# Altium PCB PCB1.PcbDoc
Units mm, origin at the board's own origin, x right, y up, seen from the top; angles counter-clockwise.
Board outline 82 x 40 mm, 2 copper layers (Top Layer, Bottom Layer); 10 components, 35 nets, 102 pads, 0 vias.
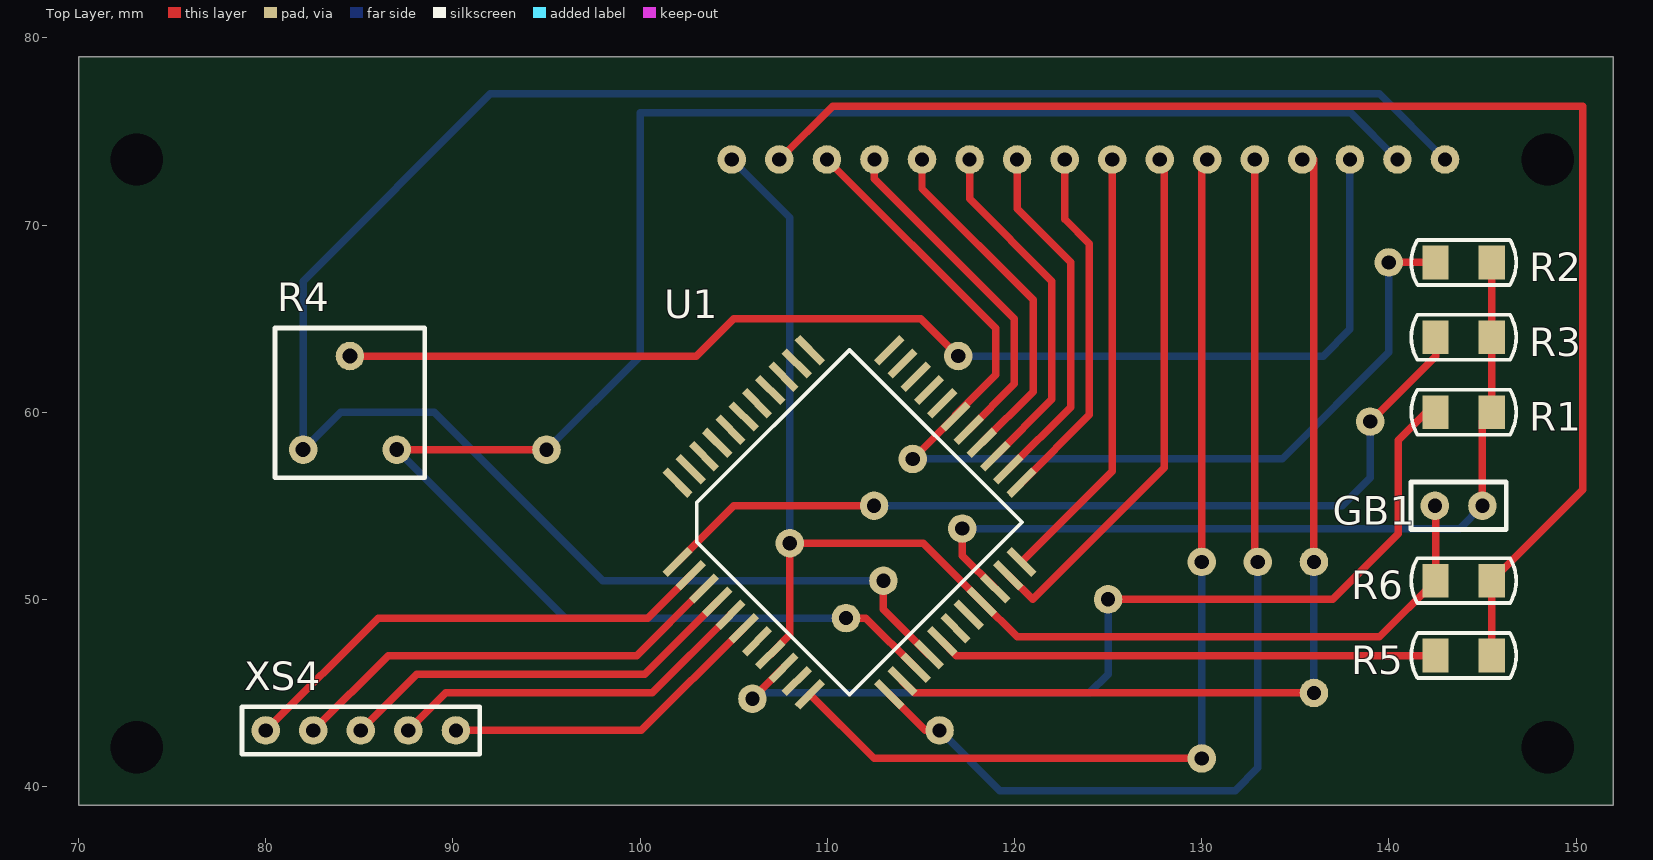
[diagram p0: Top Layer view]
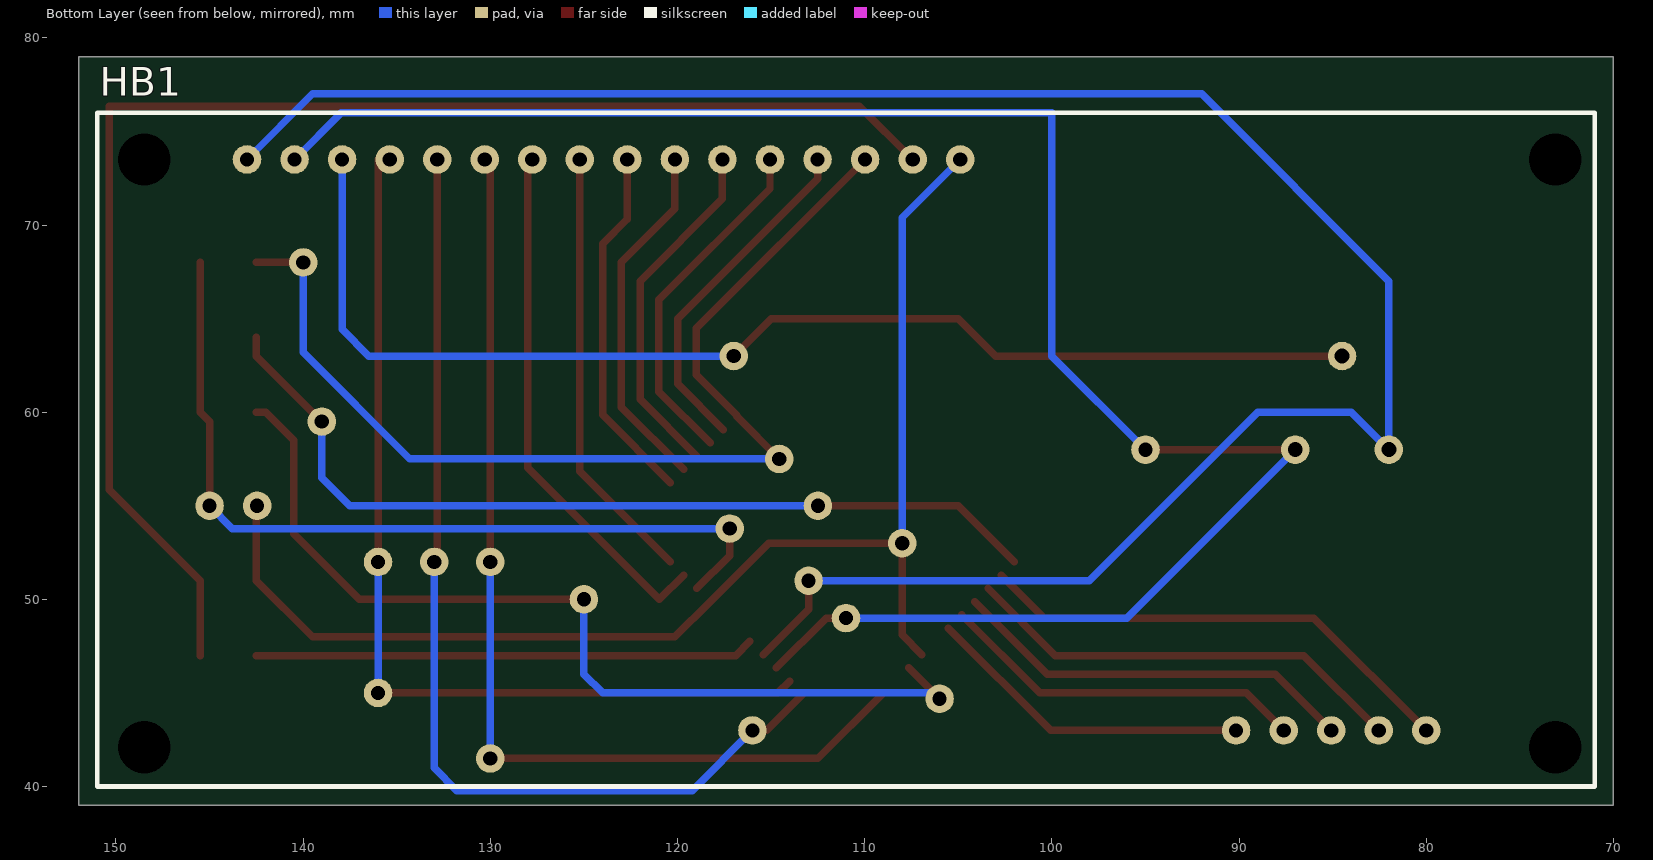
[diagram p1: Bottom Layer view, seen from below]
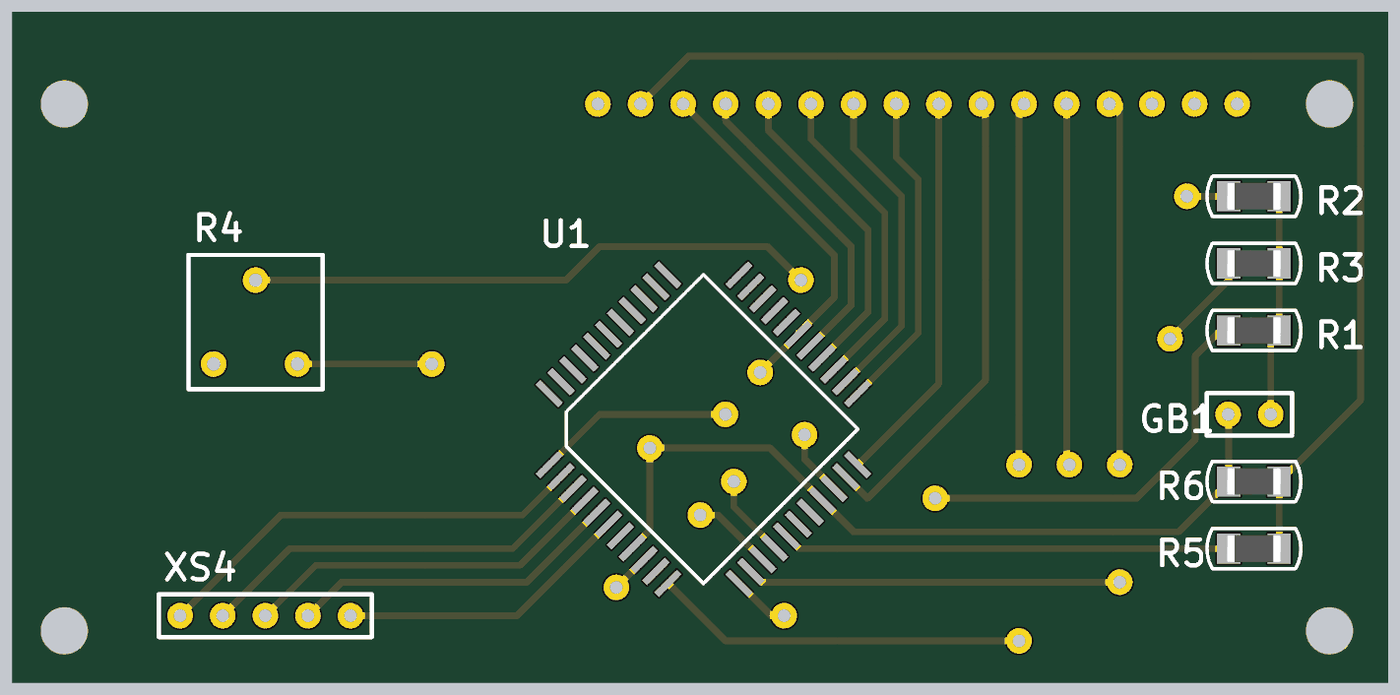
[diagram p2: 3D render of the assembled board from above, using the file's embedded part models]

## Layer stack, top to bottom
Top Solder: solder mask 0.0102, Solder Resist, Dk 3.5
Top Layer: signal copper 0.0356
Dielectric1: dielectric 0.32, FR-4, Dk 4.8
Bottom Layer: signal copper 0.0356
Bottom Solder: solder mask 0.0102, Solder Resist, Dk 3.5

## Board outline
70,39 152,39 152,79 70,79

## Design rules (kind name [scope] priority, off if disabled: settings)
Clearance [All] p1: gap=0.254 ignorepadtopadclearanceinfootprint=FALSE except(0: Arc-Hole Track-Hole SMDPad-Hole THPad-Hole Via-Hole Fill-Hole Poly-Hole Region-Hole Text-Hole)
DiffPairsRouting [All] p1: maxlimit=0.4 minlimit=0.4 mostfreqgap=0.4 toplayer_minwidth=0.381 toplayer_maxwidth=0.381 toplayer_prefwidth=0.381 bottomlayer_minwidth=0.381 bottomlayer_maxwidth=0.381 bottomlayer_prefwidth=0.381 maxuncoupledlength=12.7
PolygonConnect [All] p1: connectstyle=Relief reliefconductorwidth=0.254 reliefentries=4 polygonreliefangle="90 Angle" airgapwidth=0.254
RoutingVias [All] p1: holewidth=0.711 width=1.27 viastyle="Through Hole" minholewidth=0.711 minwidth=1.27 maxholewidth=0.711 maxwidth=1.27
SolderMaskExpansion [All] p1: expansion=0.102
Width [All] p1: maxlimit=0.4 minlimit=0.4 preferedwidth=0.4 minimp=50.000000 maximp=50.000000 favimp=50.000000
29 further rules are at their usual default settings.

## Classes and differential pairs
component class "Keyboard Schematic": VD1 VD2 VD3 VD4 VD5 VD6 XS1 XS2

## Components (designator, comment, footprint, x,y, rotation, side; value= is the part's Value field where it differs from the comment)
GB1 "4.5v" XS2holes 145,55 r90 top
HB1 "HY-1602B3" lcd-screen 151,76 r180 bottom
R1 "3.3K" R1206 144,60 r0 top
R2 "5.1K" R1206 144,68 r180 top
R3 "1K" R1206 144,64 r0 top
R4 "22K" SH-655MCL 82,58 r0 top
R5 "100" R1206 144,47 r180 top
R6 "10K" R1206 144,51 r180 top
U1 "PIC16F873" QFP44 102,52 r45 top
XS4 "PORT6" XS5HOLES 80,43 r270 top

## Footprints (in the part's own frame and the unit in brackets; to place one, negate y for a bottom-side part, rotate by r counter-clockwise, add the part's x,y. Pads: shape width x height; smd on the part's side, far side on the other; paste and mask are expansions set on the pad)
lcd-screen [mil] "qapass1602a"
  round 60 hole 110.24: 0(98.43,-1334.65) 0(98.43,-98.43) 0(3066.93,-1334.65) 0(3066.93,-98.43)
  round 60 hole 30: 1(1614.96,-98.43) 2(1514.96,-98.43) 3(1414.96,-98.43) 4(1314.96,-98.43) 5(1214.96,-98.43) 6(1114.96,-98.43) 7(1014.96,-98.43) 8(914.96,-98.43) 9(814.96,-98.43) 10(714.96,-98.43) 11(614.96,-98.43) 12(514.96,-98.43) 13(414.96,-98.43) 14(314.96,-98.43) 15(1714.96,-98.43) 16(1814.96,-98.43)
  silkscreen extent 0,-1417 3150,0
QFP44 [mm]
  rect 1.9x0.406 smd: 1(0,0) 2(0,-1) 3(0,-2) 4(0,-3) 5(0,-4) 6(0,-5) 7(0,-6) 8(0,-7) 9(0,-8) 10(0,-9) 11(0,-10) 23(15.994,-10) 24(15.994,-9) 25(15.994,-8) 26(15.994,-7) 27(15.994,-6) 28(15.994,-5) 29(15.994,-4) 30(15.994,-3) 31(15.994,-2) 32(15.994,-1) 33(15.994,0)
  rect 0.406x1.9 smd: 12(2.997,-12.997) 13(3.997,-12.997) 14(4.997,-12.997) 15(5.997,-12.997) 16(6.997,-12.997) 17(7.997,-12.997) 18(8.997,-12.997) 19(9.997,-12.997) 20(10.997,-12.997) 21(11.997,-12.997) 22(12.997,-12.997) 34(12.997,2.997) 35(11.997,2.997) 36(10.997,2.997) 37(9.997,2.997) 38(8.997,2.997) 39(7.997,2.997) 40(6.997,2.997) 41(5.997,2.997) 42(4.997,2.997) 43(3.997,2.997) 44(2.997,2.997)
  silkscreen extent 1.48,-11.51 14.51,1.51
R1206 [mm] "3216M"
  rect 1.4x1.8 smd: 1(-1.5,0) 2(1.5,0)
  silkscreen extent -2.8,-1.2 2.8,1.2, body extent -1.6,-0.8 1.6,0.8, height 0.6
SH-655MCL [mm]
  round 1.524 hole 0.8: 1(0,0) 2(2.5,5) 3(5,0)
  silkscreen extent -1.5,-1.5 6.5,6.5
XS2holes [mil]
  round 60 hole 30: 1(0,0) 2(0,100)
  silkscreen extent -50,-50 50,150
XS5HOLES [mil]
  round 60 hole 30: 1(0,0) 2(0,100) 3(0,200) 4(0,300) 5(0,400)
  silkscreen extent -50,-50 50,450

## Part data
GB1: library part BAT
R1 R2 R3 R5 R6: library part Resistor_0,125W
R4: library part Resistor-Trimmer-1

## Free pads (board coordinates)
  round 1.524 hole 0.762: 0(108,53) 1(117.216,53.784) 2(117,63) 3(111,49) 4(113,51) 5(106,44.686) 6(125,50) 7(130,41.5) 8(130,52) 9(133,52) 10(116,43) 11(136,45) 12(136,52) 14(95,58) 15(112.5,55) 16(114.571,57.5) 17(140,68) 18(139,59.5)

## Nets (pads, with @x,y where several pads share a name; then routed paths per layer and width w, separated by ;. In a path a pad name is that pad's centre, name@x,y a point inside that pad or via, vN(x,y) a via of type N, cw(c..) or ccw(c..) an arc to the next point about the centre after c; other vN are vias at no path point)
1: HB1.8 U1.21 | length 28.3
  Top Layer w0.4: U1.21 120.966,50 128,57.034 128,73.26 HB1.8
2: HB1.7 U1.22 | length 23.5
  Top Layer w0.4: U1.22 125.22,56.839 HB1.7
3: HB1.6 U1.23 | length 19.3
  Top Layer w0.4: U1.23 124,59.858 124,69 122.68,70.32 HB1.6
4: HB1.5 U1.24 | length 19.1
  Top Layer w0.4: U1.24 123,60.272 123,68 120.14,70.86 HB1.5
5: HB1.4 U1.25 | length 18.9
  Top Layer w0.4: HB1.4 117.6,71.4 122,67 122,60.686 U1.25
6: HB1.3 U1.26 | length 18.7
  Top Layer w0.4: HB1.3 115.06,71.94 121,66 121,61.101 U1.26
7: HB1.2 U1.27 | length 18.5
  Top Layer w0.4: HB1.2 112.52,72.48 120,65 120,61.515 U1.27
8: HB1.1 pad.16 pad.17 R2.2 U1.28 | length 56.7
  Top Layer w0.4: HB1.1 119,64.48 119,62 116.845,59.845 U1.28 pad.16 ; pad.17 R2.2
  Bottom Layer w0.4: pad.16 134.304,57.5 140,63.196 pad.17
9: U1.2 XS4.1 | length 26.1
  Top Layer w0.4: XS4.1 86,49 100.414,49 U1.2
10: U1.3 XS4.2 | length 24
  Top Layer w0.4: XS4.2 86.54,47 99.828,47 U1.3
11: U1.4 XS4.3 | length 21.9
  Top Layer w0.4: XS4.3 88.08,46 100.243,46 U1.4
12: U1.5 XS4.4 | length 19.8
  Top Layer w0.4: XS4.4 89.62,45 100.657,45 U1.5
13: U1.6 XS4.5 | length 17.6
  Top Layer w0.4: XS4.5 100.071,43 U1.6
NetGB1_1: GB1.1 pad.1 R1.2 R2.1 R3.2 U1.20 | length 45.4
  Top Layer w0.4: pad.1 117.216,52.336 U1.20 ; GB1.1 145,59.5 R1.2 R3.2 R2.1
  Bottom Layer w0.4: pad.1 143.784,53.784 GB1.1
NetGB1_2: GB1.2 HB1.16 pad.0 R6.2 U1.8 U1.19 | length 69.9
  Top Layer w0.4: U1.8 108,48.1 pad.0 115.138,53 U1.19 120.138,48 139.5,48 R6.2 GB1.2@142.5,54.96
  Bottom Layer w0.4: HB1.16 108,70.4 pad.0
NetHB1_9: HB1.9 pad.7 pad.8 U1.11 | length 54.5
  Top Layer w0.4: U1.11 112.5,41.5 pad.7 ; pad.8 130,73.2 HB1.9
  Bottom Layer w0.4: pad.7 pad.8
NetHB1_10: HB1.10 pad.9 pad.10 U1.12 | length 54.7
  Top Layer w0.4: U1.12 115.238,43 pad.10 ; pad.9@132.84,52.16 HB1.10
  Bottom Layer w0.4: pad.10 119.216,39.784 131.784,39.784 133,41 pad.9
NetHB1_11: HB1.11 pad.11 pad.12 U1.13 | length 50.9
  Top Layer w0.4: U1.13 114.653,45 pad.11 ; pad.12 HB1.11@136,73.5
  Bottom Layer w0.4: HB1.11@135.38,73.38 HB1.11 ; pad.11 pad.12
NetHB1_12: HB1.12 pad.2 R4.2 | length 64.7
  Top Layer w0.4: R4.2 103,63 105,65 115,65 pad.2
  Bottom Layer w0.4: pad.2 136.5,63 137.92,64.42 HB1.12
NetHB1_13: HB1.13 pad.3 pad.14 R4.3 U1.14 | length 102.1
  Top Layer w0.4: R4.3 pad.14 ; pad.3 112.067,49 U1.14
  Bottom Layer w0.4: R4.3 96,49 pad.3 ; pad.14 100,63 100,76 137.96,76 HB1.13
NetHB1_14: HB1.14 pad.4 R4.1 U1.15 | length 116.1
  Top Layer w0.4: pad.4 113,49.481 U1.15
  Bottom Layer w0.4: pad.4 98,51 89,60 84,60 R4.1 82,67 92,77 139.5,77 HB1.14
NetHB1_15: HB1.15 R5.1 R6.1 | length 75.5
  Top Layer w0.4: HB1.15 110.294,76.354 150.354,76.354 150.354,55.854 R6.1 R5.1
NetR1_1: pad.5 pad.6 R1.1 U1.9 | length 50.5
  Top Layer w0.4: pad.5 U1.9 ; pad.6 137,50 140.5,53.5 140.5,58.5 142,60 R1.1
  Bottom Layer w0.4: pad.5 106.314,45 124,45 125,46 pad.6
NetR3_1: pad.15 pad.18 R3.1 U1.1 | length 47.8
  Top Layer w0.4: U1.1 105,55 pad.15 ; pad.18 142.5,63 R3.1
  Bottom Layer w0.4: pad.15 137.5,55 139,56.5 pad.18
NetR5_2: R5.2 U1.16 | length 26.7
  Top Layer w0.4: U1.16 116.895,47 R5.2
NetSB1_1: 
NetSB1_2: 
NetSB2_1: 
NetSB4_2: 
NetSB5_2: 
NetSB6_2: 
NetSB7_2: 
NetSB8_1: 
NetSB12_1: 
NetSB15_2: 
pads on no net: HB1.0 U1.7 U1.10 U1.17 U1.18 U1.29 U1.30 U1.31 U1.32 U1.33 U1.34 U1.35 U1.36 U1.37 U1.38 U1.39 U1.40 U1.41 U1.42 U1.43 U1.44